# Altium PCB Inc_filter_v2.PcbDoc (part 4 of 4)
Units mm, origin at the board's own origin, x right, y up, seen from the top; angles counter-clockwise.
Board outline 339.6 x 339.6 mm, 2 copper layers (Top Layer, Bottom Layer); 640 components, 290 nets, 1708 pads, 357 vias.
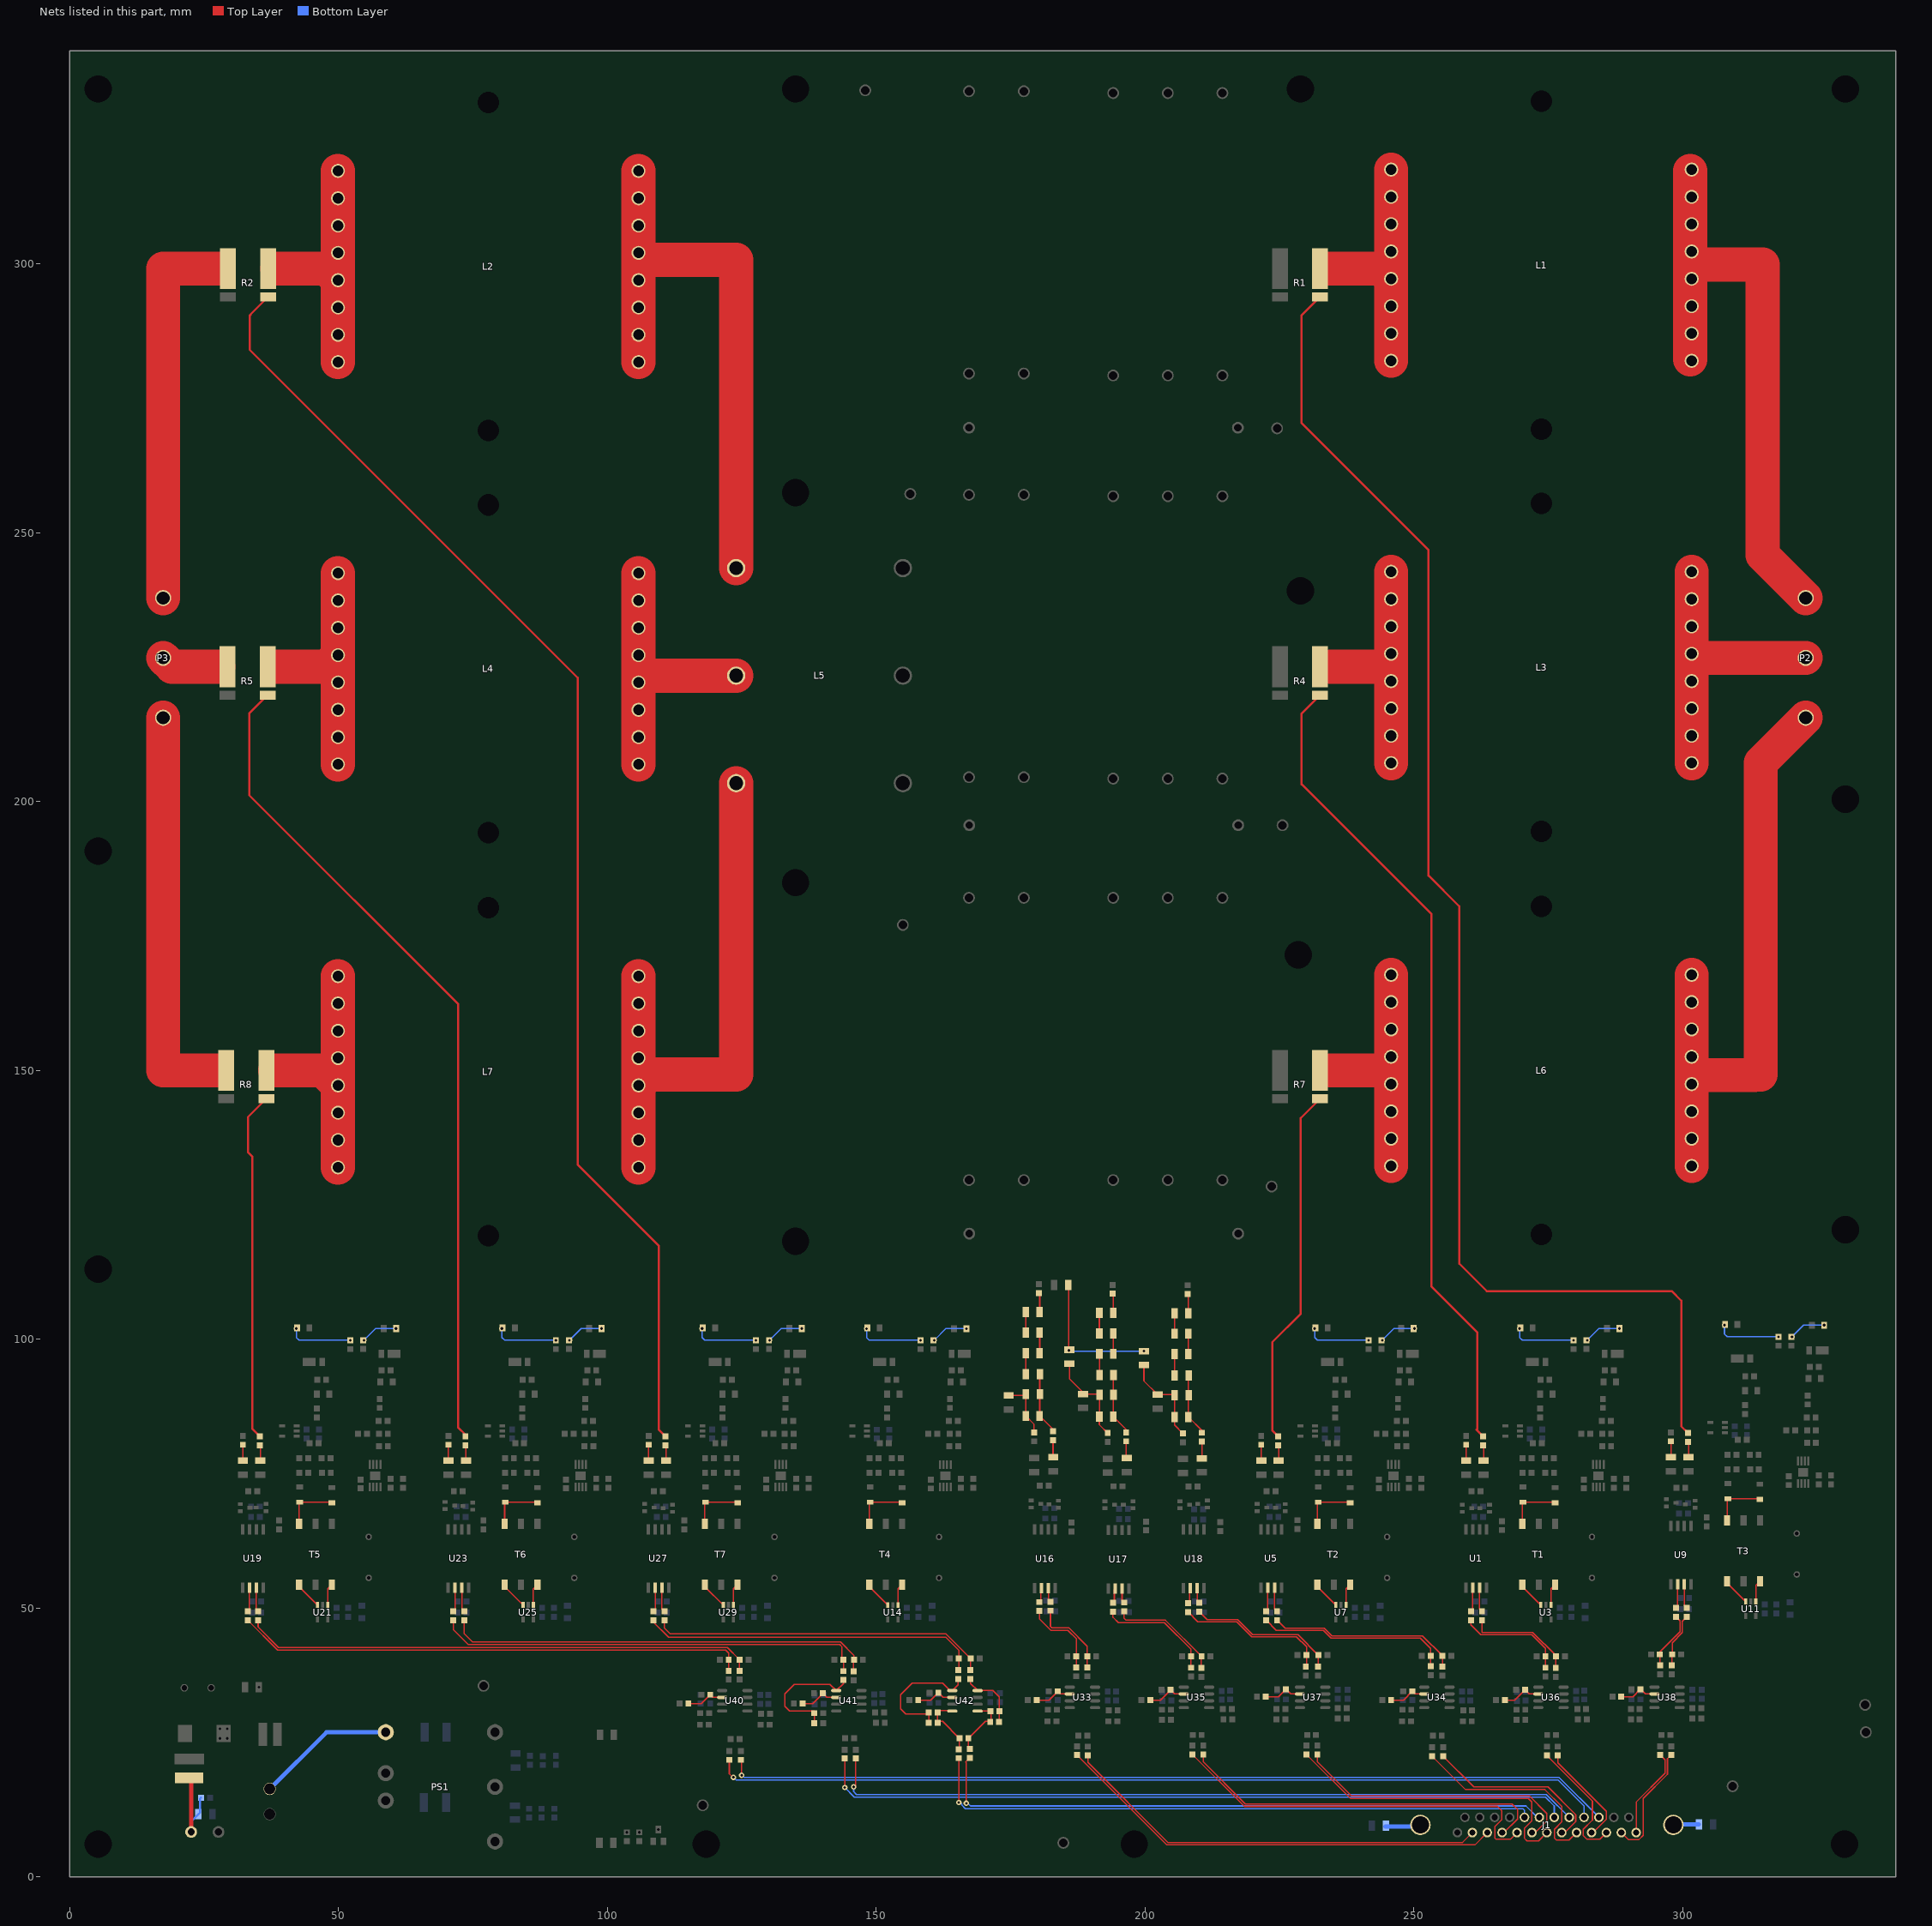
[diagram p4: the nets of this part, all layers, seen from the top]

## Via types
v1: diameter 1.016, hole 0.508, Top Layer to Bottom Layer, 354 vias
v2: diameter 1.27, hole 0.762, Top Layer to Bottom Layer, 3 vias

## Nets (pads, with @x,y where several pads share a name; then routed paths per layer and width w, separated by ;. In a path a pad name is that pad's centre, name@x,y a point inside that pad or via, vN(x,y) a via of type N, cw(c..) or ccw(c..) an arc to the next point about the centre after c; other vN are vias at no path point) (continued)
NetC267_2: C267.2 R165.1 R167.2 U41.1 | length 23.6
  Top Layer w0.2: C267.2@138.432,28.829 138.495,28.892 R167.2@138.495,30.48 138.495,30.861 133.859,30.861 132.97,31.75 132.97,34.036 134.748,35.814 141.415,35.814 U41.1@142.558,34.671 143.892,36.005 R165.1@143.892,36.64
NetC268_1: C268.1 R168.1 R172.1 R193.2 U42.5 | length 12.1
  Top Layer w0.2: R193.2@167.386,23.812 167.132,24.066 R172.1@167.132,25.781 170.307,28.956 171.261,28.956 171.324,29.019 171.324,30.988 171.197,30.861 U42.5@168.848,30.861
NetC268_2: C268.2 R168.2 R170.1 U42.8 | length 11.9
  Top Layer w0.2: R170.1@167.514,36.83 167.514,36.005 U42.8@168.848,34.671 171.705,34.671 172.847,33.529 C268.2@172.847,28.829
NetC274_1: C274.1 R172.2 R175.1 R194.2 U42.4 | length 12.4
  Top Layer w0.2: U42.4@164.148,30.861 164.021,30.988 161.354,30.988 161.354,28.956 162.307,28.956 R172.2@165.482,25.781 165.482,23.877 R194.2@165.354,23.749
NetC274_2: C274.2 R173.1 R175.2 U42.1 | length 23.6
  Top Layer w0.2: C274.2@159.768,28.702 159.768,30.353 155.449,30.353 154.56,31.242 154.56,33.909 156.719,36.068 162.307,36.068 163.704,34.671 U42.1@164.148,34.671 165.228,35.751 R173.1@165.228,36.83
NetC275_1: C275.1 C276.1 L8.1 P1.1 | length 17.3
  Top Layer w0.762: L8.1@22.225,18.415 22.606,18.034 P1.1@22.606,8.382
  Bottom Layer w0.4: P1.1@22.606,8.382 22.606,10.317 C275.1@23.973,11.684 24.257,11.968 24.257,14.541 C276.1@24.448,14.732
NetD3_1: D3.1 D6.2 T1.6 | length 10.1
  Top Layer w0.254: T1.6@270.134,65.666 270.134,69.594 D3.1@270.263,69.723 276.105,69.723 D6.2@276.232,69.596
NetD4_K: D4.K R15.2 | length 12.1
  Top Layer w0.254: D4.K@269.628,101.988 D4.K@269.748,102.108
  Bottom Layer w0.254: v1@269.628,101.988 v1(269.628,101.981) 269.628,100.328 270.135,99.821 v1(279.661,99.821)
NetD7_A: D7.A R17.2 | length 7.3
  Top Layer w0.254: R17.2@282.074,99.822 v1(282.201,99.822) ; D7.A@287.916,101.727 v1(288.17,101.981)
  Bottom Layer w0.254: v1(282.201,99.822) 284.36,101.981 v1(288.17,101.981)
NetD11_1: D11.1 D14.2 T2.6 | length 10.1
  Top Layer w0.254: T2.6@232.034,65.666 232.034,69.594 D11.1@232.163,69.723 238.005,69.723 D14.2@238.132,69.596
NetD12_K: D12.K R24.2 | length 12.1
  Top Layer w0.254: D12.K@231.528,101.988 D12.K@231.648,102.108
  Bottom Layer w0.254: v1@231.528,101.988 v1(231.528,101.981) 231.528,100.328 232.035,99.821 v1(241.561,99.821)
NetD15_A: D15.A R26.2 | length 7.3
  Top Layer w0.254: R26.2@243.974,99.822 v1(244.101,99.822) ; D15.A@249.816,101.727 v1(250.07,101.981)
  Bottom Layer w0.254: v1(244.101,99.822) 246.26,101.981 v1(250.07,101.981)
NetD19_1: D19.1 D22.2 T3.6 | length 10.1
  Top Layer w0.254: T3.6@308.227,66.301 308.227,70.229 D19.1@308.356,70.358 314.198,70.358 D22.2@314.325,70.231
NetD20_K: D20.K R33.2 | length 12.1
  Top Layer w0.254: D20.K@307.721,102.623 D20.K@307.841,102.743
  Bottom Layer w0.254: v1@307.721,102.623 v1(307.721,102.616) 307.721,100.963 308.228,100.456 v1(317.754,100.456)
NetD23_A: D23.A R35.2 | length 7.3
  Top Layer w0.254: R35.2@320.167,100.457 v1(320.294,100.457) ; D23.A@326.009,102.362 v1(326.263,102.616)
  Bottom Layer w0.254: v1(320.294,100.457) 322.453,102.616 v1(326.263,102.616)
NetD25_1: D25.1 D28.2 T4.6 | length 10.1
  Top Layer w0.254: T4.6@148.715,65.659 148.715,69.587 D25.1@148.844,69.716 154.686,69.716 D28.2@154.813,69.589
NetD26_K: D26.K R37.2 | length 12.1
  Top Layer w0.254: D26.K@148.209,101.981 D26.K@148.329,102.101
  Bottom Layer w0.254: v1@148.209,101.981 v1(148.209,101.974) 148.209,100.321 148.716,99.814 v1(158.242,99.814)
NetD29_A: D29.A R39.2 | length 7.3
  Top Layer w0.254: R39.2@160.655,99.815 v1(160.782,99.815) ; D29.A@166.497,101.72 v1(166.751,101.974)
  Bottom Layer w0.254: v1(160.782,99.815) 162.941,101.974 v1(166.751,101.974)
NetD39_1: D39.1 D42.2 T5.6 | length 10.1
  Top Layer w0.254: T5.6@42.67,65.666 42.67,69.594 D39.1@42.799,69.723 48.641,69.723 D42.2@48.768,69.596
NetD40_K: D40.K R82.2 | length 12.1
  Top Layer w0.254: D40.K@42.164,101.988 D40.K@42.284,102.108
  Bottom Layer w0.254: v1@42.164,101.988 v1(42.164,101.981) 42.164,100.328 42.671,99.821 v1(52.197,99.821)
NetD43_A: D43.A R84.2 | length 7.3
  Top Layer w0.254: R84.2@54.61,99.822 v1(54.737,99.822) ; D43.A@60.452,101.727 v1(60.706,101.981)
  Bottom Layer w0.254: v1(54.737,99.822) 56.896,101.981 v1(60.706,101.981)
NetD47_1: D47.1 D50.2 T6.6 | length 10.1
  Top Layer w0.254: T6.6@80.897,65.666 80.897,69.594 D47.1@81.026,69.723 86.868,69.723 D50.2@86.995,69.596
NetD48_K: D48.K R91.2 | length 12.1
  Top Layer w0.254: D48.K@80.391,101.988 D48.K@80.511,102.108
  Bottom Layer w0.254: v1@80.391,101.988 v1(80.391,101.981) 80.391,100.328 80.898,99.821 v1(90.424,99.821)
NetD51_A: D51.A R93.2 | length 7.3
  Top Layer w0.254: R93.2@92.837,99.822 v1(92.964,99.822) ; D51.A@98.679,101.727 v1(98.933,101.981)
  Bottom Layer w0.254: v1(92.964,99.822) 95.123,101.981 v1(98.933,101.981)
NetD55_1: D55.1 D58.2 T7.6 | length 10.1
  Top Layer w0.254: T7.6@118.115,65.666 118.115,69.594 D55.1@118.244,69.723 124.086,69.723 D58.2@124.213,69.596
NetD56_K: D56.K R100.2 | length 12.1
  Top Layer w0.254: D56.K@117.609,101.988 D56.K@117.729,102.108
  Bottom Layer w0.254: v1@117.609,101.988 v1(117.609,101.981) 117.609,100.328 118.116,99.821 v1(127.642,99.821)
NetD59_A: D59.A R102.2 | length 7.3
  Top Layer w0.254: R102.2@130.055,99.822 v1(130.182,99.822) ; D59.A@135.897,101.727 v1(136.151,101.981)
  Bottom Layer w0.254: v1(130.182,99.822) 132.341,101.981 v1(136.151,101.981)
NetFB1_1: FB1.1 R4.3 | length 153.4
  Top Layer w0.4: R4.3@232.611,219.784 R4.3@232.537,219.784 229.108,216.355 229.108,203.2 253.206,179.102 253.206,109.851 261.747,101.31 261.747,83.244 261.64,83.137 FB1.1@262.839,81.938
NetFB1_2: FB1.2 R11.1 | length 2.9
  Top Layer w0.2: FB1.2@262.839,80.288 262.941,80.187 R11.1@262.941,77.402
NetFB2_2: FB2.2 R14.1 | length 3
  Top Layer w0.2: R14.1@259.69,77.402 FB2.2@259.69,80.39
NetFB5_1: FB5.1 R7.3 | length 67.3
  Top Layer w0.2: FB5.1@224.663,82.04 224.536,82.167 FB5.1@224.663,82.294
  Top Layer w0.4: FB5.1@224.739,81.938 223.647,83.031 223.647,99.436 228.949,104.739 228.949,141.139 R7.3@232.537,144.727
NetFB5_2: FB5.2 R20.1 | length 2.9
  Top Layer w0.2: FB5.2@224.739,80.288 224.841,80.187 R20.1@224.841,77.402
NetFB6_2: FB6.2 R23.1 | length 3
  Top Layer w0.2: R23.1@221.59,77.402 FB6.2@221.59,80.39
NetFB9_1: FB9.1 R1.3 | length 262.6
  Top Layer w0.4: R1.3@232.537,293.825 229.108,290.396 229.108,270.347 252.698,246.757 252.698,186.214 258.413,180.499 258.413,114.042 263.521,108.934 297.938,108.934 299.72,107.152 299.72,83.786 FB9.1@300.932,82.573
NetFB9_2: FB9.2 R29.1 | length 2.9
  Top Layer w0.2: FB9.2@300.932,80.923 301.034,80.822 R29.1@301.034,78.037
NetFB10_2: FB10.2 R32.1 | length 3
  Top Layer w0.2: R32.1@297.783,78.037 FB10.2@297.783,81.025
NetFB15_2: FB15.2 R42.1 | length 3.6
  Top Layer w0.254: FB15.2@180.243,108.586 180.4,108.429 R42.1@180.4,105.029
NetFB16_2: FB16.2 R54.1 | length 3.6
  Top Layer w0.254: FB16.2@193.928,108.458 194.085,108.301 R54.1@194.085,104.901
NetFB17_2: FB17.2 R66.1 | length 3.6
  Top Layer w0.254: FB17.2@207.899,108.395 208.056,108.238 R66.1@208.056,104.838
NetFB18_1: FB18.1 R8.3 | length 65.2
  Top Layer w0.2: FB18.1@35.375,81.938 FB18.1@35.433,81.996
  Top Layer w0.4: FB18.1@35.375,81.938 34.004,83.309 34.004,133.926 33.147,134.783 33.147,141.298 R8.3@36.576,144.727
NetFB18_2: FB18.2 R78.1 | length 2.9
  Top Layer w0.2: FB18.2@35.375,80.288 35.477,80.187 R78.1@35.477,77.402
NetFB19_2: FB19.2 R81.1 | length 3
  Top Layer w0.2: R81.1@32.226,77.402 FB19.2@32.226,80.39
NetFB22_1: FB22.1 R5.3 | length 156
  Top Layer w0.2: FB22.1@73.602,81.938 FB22.1@73.66,81.996
  Top Layer w0.4: R5.3@36.83,219.784 33.401,216.355 33.401,201.168 72.263,162.306 72.263,83.566 73.602,82.227 FB22.1@73.602,81.938
NetFB22_2: FB22.2 R87.1 | length 2.9
  Top Layer w0.2: FB22.2@73.602,80.288 73.704,80.187 R87.1@73.704,77.402
NetFB23_2: FB23.2 R90.1 | length 3
  Top Layer w0.2: R90.1@70.453,77.402 FB23.2@70.453,80.39
NetFB26_1: FB26.1 R2.3 | length 245.3
  Top Layer w0.4: R2.3@36.934,293.825 33.655,290.546 33.655,290.487 33.496,290.328 33.496,284.004 94.488,223.012 94.488,132.461 109.601,117.348 109.601,83.158 FB26.1@110.82,81.938
NetFB26_2: FB26.2 R96.1 | length 2.9
  Top Layer w0.2: FB26.2@110.82,80.288 110.922,80.187 R96.1@110.922,77.402
NetFB27_2: FB27.2 R99.1 | length 3
  Top Layer w0.2: R99.1@107.671,77.402 FB27.2@107.671,80.39
NetJ1_2: J1.2 R190.1 | length 79.7
  Top Layer w0.254: R190.1@189.357,22.607 189.357,21.285 204.215,6.426 259.015,6.426 J1.2@260.844,8.255
NetJ1_3: J1.3 R192.1 | length 84.2
  Top Layer w0.254: R192.1@187.325,22.67 204.026,5.969 261.328,5.969 J1.3@263.614,8.255
NetJ1_4: J1.4 R186.1 | length 69.2
  Top Layer w0.254: R186.1@210.82,22.797 210.82,21.412 218.643,13.589 268.224,13.589 269.24,12.573 269.24,10.795 266.7,8.255 J1.4@266.384,8.255
NetJ1_5: J1.5 R188.1 | length 72.2
  Top Layer w0.254: R188.1@208.788,22.797 218.453,13.132 265.506,13.132 266.319,12.319 266.319,10.668 265.049,9.398 265.049,7.239 265.252,7.036 267.935,7.036 J1.5@269.154,8.255
NetJ1_6: J1.6 R182.1 | length 53.1
  Top Layer w0.254: R182.1@232.029,22.797 232.029,21.412 238.328,15.113 271.399,15.113 274.701,11.811 274.701,10.414 272.542,8.255 J1.6@271.924,8.255
NetJ1_7: J1.7 R184.1 | length 57.9
  Top Layer w0.254: R184.1@229.997,22.797 238.189,14.605 271.26,14.605 271.907,13.958 271.907,10.414 270.51,9.017 270.51,7.239 271.018,6.731 273.17,6.731 J1.7@274.694,8.255
NetJ1_8: J1.8 R189.1 | length 33.9
  Top Layer w0.254: R189.1@255.397,22.479 261.112,16.764 274.904,16.764 280.068,11.6 280.068,10.295 278.028,8.255 J1.8@277.464,8.255
NetJ1_9: J1.9 R191.1 | length 39.3
  Top Layer w0.254: R191.1@253.365,22.479 259.588,16.256 274.32,16.256 277.495,13.081 277.495,10.287 276.098,8.89 276.098,7.239 276.479,6.858 278.837,6.858 J1.9@280.234,8.255
NetJ1_10: J1.10 R185.1 | length 19.4
  Top Layer w0.2: 276.733,21.221 R185.1@276.733,22.606
  Top Layer w0.254: 276.733,21.221 285.75,12.204 285.75,10.732 283.273,8.255 J1.10@283.004,8.255
NetJ1_11: J1.11 R187.1 | length 24.2
  Top Layer w0.254: R187.1@274.701,22.606 283.17,14.137 283.17,10.59 281.453,8.873 281.453,7.726 282.143,7.036 284.555,7.036 J1.11@285.774,8.255
NetJ1_12: J1.12 R181.1 | length 22
  Top Layer w0.254: J1.12@288.544,8.255 289.814,6.985 291.846,6.985 292.608,7.747 292.608,14.593 297.129,19.115 297.129,21.984 R181.1@297.815,22.67
NetJ1_13: J1.13 R183.1 | length 17
  Top Layer w0.254: J1.13@291.314,8.255 291.314,13.946 296.672,19.304 296.672,21.781 R183.1@295.783,22.67
NetJ1_16: J1.16 R197.1 | length 165.6
  Top Layer w0.254: R197.1@124.841,21.781 124.765,21.705 124.968,21.502 v1(124.968,18.923)
  Bottom Layer w0.254: v1(124.968,18.923) 125.4,18.491 276.993,18.491 J1.16@284.389,11.095
NetJ1_17: J1.17 R198.1 | length 166.1
  Top Layer w0.254: R198.1@122.682,21.781 122.682,19.177 123.317,18.542 v1(123.444,18.542)
  Bottom Layer w0.254: v1(123.444,18.542) 123.952,18.034 276.803,18.034 281.619,13.218 J1.17@281.619,11.095
NetJ1_18: J1.18 R195.1 | length 141.8
  Top Layer w0.254: v1(145.796,16.764) 146.05,16.764 146.177,16.637 R195.1@146.177,22.035
  Bottom Layer w0.254: v1(145.796,16.764) 145.796,15.875 146.333,15.338 274.606,15.338 J1.18@278.849,11.095
NetJ1_19: J1.19 R196.1 | length 140.9
  Top Layer w0.254: v1(144.145,16.637) R196.1@144.145,22.035
  Bottom Layer w0.2: J1.19@276.079,11.095 J1.19@276.079,11.322
  Bottom Layer w0.254: v1(144.145,16.637) 145.923,14.859 274.438,14.859 276.079,13.218 J1.19@276.079,11.322
NetJ1_20: J1.20 R193.1 | length 116.5
  Top Layer w0.254: v1(166.751,13.716) 166.751,21.273 166.624,21.4 R193.1@167.386,22.162
  Bottom Layer w0.254: v1(166.751,13.716) 167.005,13.716 167.513,13.208 270.817,13.208 272.93,11.095 J1.20@273.309,11.095
NetJ1_21: J1.21 R194.1 | length 115.5
  Top Layer w0.254: v1(165.354,13.843) R194.1@165.354,22.099
  Bottom Layer w0.254: v1(165.354,13.843) 165.608,13.843 165.913,13.538 165.913,13.369 166.582,12.7 270.256,12.7 270.539,12.417 J1.21@270.539,11.095
NetJ1_26: J1.26 R199.1 | length 6.7
  Bottom Layer w0.762: R199.1@244.632,9.398 250.897,9.398 J1.26@251.174,9.675
NetJ1_27: J1.27 R200.2 | length 4.8
  Bottom Layer w0.762: J1.27@298.214,9.675 298.318,9.779 R200.2@302.992,9.779
NetL1_1: L1.1 L1.2 L1.3 L1.4 L1.5 L1.6 L1.7 L1.8 P2.3 | length 114
  Top Layer w6.35: L1.1@301.371,282.194 301.371,299.593 ; L1.8@301.371,317.246 301.371,299.593 ; P2.3@322.834,237.82 314.833,245.821 314.833,299.847 301.625,299.847 301.371,299.593
NetL1_9: L1.9 L1.10 L1.11 L1.12 L1.13 L1.14 L1.15 L1.16 R1.4 | length 47.8
  Top Layer w6.35: 234.315,299.085 243.84,299.085 L1.13@245.745,297.18 ; L1.16@245.745,281.94 L1.15@245.745,287.02 L1.14@245.745,292.1 L1.13@245.745,297.18 ; L1.9@245.745,317.5 L1.10@245.745,312.42 L1.11@245.745,307.34 L1.12@245.745,302.26 L1.13@245.745,297.18
NetL2_1: L2.1 L2.2 L2.3 L2.4 L2.5 L2.6 L2.7 L2.8 L5.4 | length 111.6
  Top Layer w6.35: L2.1@105.791,281.686 L2.2@105.791,286.766 L2.3@105.791,291.846 L2.4@105.791,296.926 L2.5@105.791,302.006 ; L2.8@105.791,317.246 L2.7@105.791,312.166 L2.6@105.791,307.086 L2.5@105.791,302.006 ; L5.4@123.952,243.393 123.952,300.736 107.061,300.736 L2.5@105.791,302.006
NetL2_9: L2.9 L2.10 L2.11 L2.12 L2.13 L2.14 L2.15 L2.16 R2.4 | length 47.8
  Top Layer w6.35: 38.608,299.085 47.752,299.085 L2.13@49.911,296.926 ; L2.16@49.911,281.686 L2.15@49.911,286.766 L2.14@49.911,291.846 L2.13@49.911,296.926 ; L2.9@49.911,317.246 L2.10@49.911,312.166 L2.11@49.911,307.086 L2.12@49.911,302.006 L2.13@49.911,296.926
NetL3_1: L3.1 L3.2 L3.3 L3.4 L3.5 L3.6 L3.7 L3.8 P2.2 | length 57.1
  Top Layer w6.35: L3.1@301.625,207.137 L3.2@301.625,212.217 L3.3@301.625,217.297 L3.4@301.625,222.377 L3.5@301.625,227.457 ; L3.8@301.625,242.697 L3.7@301.625,237.617 L3.6@301.625,232.537 L3.5@301.625,227.457 ; P2.2@322.834,226.695 302.387,226.695 L3.5@301.625,227.457
NetL3_9: L3.9 L3.10 L3.11 L3.12 L3.13 L3.14 L3.15 L3.16 R4.4 | length 44.3
  Top Layer w6.35: 234.569,225.044 243.332,225.044 ; L3.16@245.745,207.137 L3.15@245.745,212.217 L3.14@245.745,217.297 L3.13@245.745,222.377 L3.12@245.745,227.457 L3.11@245.745,232.537 L3.10@245.745,237.617 L3.9@245.745,242.697
NetL4_1: L4.1 L4.2 L4.3 L4.4 L4.5 L4.6 L4.7 L4.8 L5.5 | length 54.2
  Top Layer w6.35: L4.1@105.791,206.883 L4.2@105.791,211.963 L4.3@105.791,217.043 L4.4@105.791,222.123 ; L4.8@105.791,242.443 L4.7@105.791,237.363 L4.6@105.791,232.283 L4.5@105.791,227.203 L4.4@105.791,222.123 ; L5.5@123.952,223.393 107.061,223.393 L4.4@105.791,222.123
NetL4_9: L4.9 L4.10 L4.11 L4.12 L4.13 L4.14 L4.15 L4.16 R5.4 | length 47.8
  Top Layer w6.35: 38.608,225.044 47.752,225.044 L4.12@49.911,227.203 ; L4.16@49.911,206.883 L4.15@49.911,211.963 L4.14@49.911,217.043 L4.13@49.911,222.123 L4.12@49.911,227.203 ; L4.9@49.911,242.443 L4.10@49.911,237.363 L4.11@49.911,232.283 L4.12@49.911,227.203
NetL5_6: L5.6 L7.1 L7.2 L7.3 L7.4 L7.5 L7.6 L7.7 L7.8 | length 108.7
  Top Layer w6.35: L7.1@105.791,131.953 L7.2@105.791,137.033 L7.3@105.791,142.113 L7.4@105.791,147.193 ; L7.8@105.791,167.513 L7.7@105.791,162.433 L7.6@105.791,157.353 L7.5@105.791,152.273 L7.4@105.791,147.193 ; L5.6@123.952,203.393 123.952,149.225 107.823,149.225 L7.4@105.791,147.193
NetL6_1: L6.1 L6.2 L6.3 L6.4 L6.5 L6.6 L6.7 L6.8 P2.1 | length 119.4
  Top Layer w6.35: L6.1@301.625,132.207 L6.2@301.625,137.287 L6.3@301.625,142.367 L6.4@301.625,147.447 ; L6.8@301.625,167.767 L6.7@301.625,162.687 L6.6@301.625,157.607 L6.5@301.625,152.527 L6.4@301.625,147.447 ; P2.1@322.834,215.57 314.452,207.188 314.452,149.225 313.944,149.733 313.309,149.098 303.276,149.098 L6.4@301.625,147.447
NetL6_9: L6.9 L6.10 L6.11 L6.12 L6.13 L6.14 L6.15 L6.16 R7.4 | length 46.9
  Top Layer w6.35: 234.442,149.987 245.745,149.987 ; L6.16@245.745,132.207 L6.15@245.745,137.287 L6.14@245.745,142.367 L6.13@245.745,147.447 245.745,149.987 ; L6.9@245.745,167.767 L6.10@245.745,162.687 L6.11@245.745,157.607 L6.12@245.745,152.527 245.745,149.987
NetL7_9: L7.9 L7.10 L7.11 L7.12 L7.13 L7.14 L7.15 L7.16 R8.4 | length 48.4
  Top Layer w6.35: 38.227,149.987 47.117,149.987 L7.13@49.911,147.193 ; L7.16@49.911,131.953 L7.15@49.911,137.033 L7.14@49.911,142.113 L7.13@49.911,147.193 ; L7.9@49.911,167.513 L7.10@49.911,162.433 L7.11@49.911,157.353 L7.12@49.911,152.273 L7.13@49.911,147.193
NetP3_1: P3.1 R2.1 | length 71.6
  Top Layer w6.35: P3.1@17.399,237.82 17.399,299.085 27.686,299.085
NetP3_2: P3.2 R5.1 | length 11
  Top Layer w6.35: P3.2@17.399,226.695 19.05,225.044 27.686,225.044
NetP3_3: P3.3 R8.1 | length 75.5
  Top Layer w6.35: P3.3@17.399,215.57 17.399,149.987 27.305,149.987
NetPS1_6: PS1.6 SW1.2 | length 26
  Bottom Layer w0.762: SW1.2@37.211,16.383 47.752,26.924 PS1.6@58.801,26.924
NetR12_1: R12.1 U1.7 | length 4.6
  Top Layer w0.2: U1.7@262.179,53.771 262.179,49.859 R12.1@262.636,49.402
NetR12_2: R12.2 R125.2 R127.1 | length 20.1
  Top Layer w0.2: R12.2@262.636,47.752 262.636,45.485 272.073,45.485 276.352,41.206 R125.2@276.352,38.861
NetR13_1: R13.1 U1.6 | length 4.5
  Top Layer w0.2: R13.1@260.604,49.402 260.909,49.707 U1.6@260.909,53.771
NetR13_2: R13.2 R131.2 R134.1 | length 20.1
  Top Layer w0.2: R13.2@260.604,47.752 260.604,46.863 262.385,45.082 271.906,45.082 274.447,42.54 R134.1@274.447,41.021 R131.2@274.447,38.925
NetR21_1: R21.1 U5.7 | length 4.6
  Top Layer w0.2: U5.7@224.079,53.771 224.079,49.859 R21.1@224.536,49.402
NetR21_2: R21.2 R109.2 R111.1 | length 35.5
  Top Layer w0.2: R21.2@224.536,47.752 226.041,46.247 233.338,46.247 234.735,44.85 251.568,44.85 R111.1@255.27,41.148 R109.2@255.27,39.115
NetR22_1: R22.1 U5.6 | length 4.5
  Top Layer w0.2: R22.1@222.504,49.402 222.809,49.707 U5.6@222.809,53.771
NetR22_2: R22.2 R115.2 R118.1 | length 36.1
  Top Layer w0.2: R22.2@222.504,47.752 224.412,45.844 233.171,45.844 234.568,44.447 251.148,44.447 253.111,42.484 R118.1@253.111,41.148 R115.2@253.111,39.179
NetR30_1: R30.1 U9.7 | length 4.6
  Top Layer w0.2: U9.7@300.272,54.406 300.272,50.494 R30.1@300.729,50.037
NetR30_2: R30.2 R141.2 R143.1 | length 10.2
  Top Layer w0.2: R141.2@297.942,39.37 297.942,41.338 R143.1@298.006,41.402 298.006,43.567 299.866,45.427 299.866,47.524 R30.2@300.729,48.387
NetR31_1: R31.1 U9.6 | length 4.5
  Top Layer w0.2: R31.1@298.697,50.037 299.002,50.342 U9.6@299.002,54.406
NetR31_2: R31.2 R147.2 R150.1 | length 10.8
  Top Layer w0.2: R147.2@295.783,39.37 295.719,39.434 R150.1@295.719,41.402 295.719,41.851 299.463,45.594 299.463,47.524 ; R31.2@298.697,48.387 299.466,47.618
NetR42_2: R42.2 R43.1 | length 3.8
  Top Layer w0.254: R43.1@177.8,101.219 R42.2@177.8,105.029
NetR43_2: R43.2 R49.1 | length 3.8
  Top Layer w0.254: R49.1@180.4,97.409 R43.2@180.4,101.219
NetR44_1: R44.1 R178.1 | length 3.2
  Top Layer w0.254: R178.1@182.88,81.217 182.88,78.068 R44.1@182.91,78.038
NetR45_1: R45.1 U16.7 | length 2.8
  Top Layer w0.254: U16.7@182.021,53.743 182.021,51.561 R45.1@182.402,51.18 R45.1@182.402,51.054
NetR45_2: R45.2 R108.2 R110.1 | length 15.2
  Top Layer w0.2: R108.2@189.23,38.988 R110.1@189.231,41.021
  Top Layer w0.254: R45.2@182.402,49.53 182.402,46.591 182.661,46.332 185.824,46.332 189.23,42.926 R110.1@189.231,41.021
NetR46_1: R46.1 R47.1 R51.2 R207.2 | length 10.9
  Top Layer w0.254: R207.2@174.625,89.535 177.673,89.535 177.8,89.662 R47.1@177.8,85.725 179.354,84.171 R51.2@179.354,82.677
NetR46_2: R46.2 R47.2 R50.2 R178.2 | length 11.3
  Top Layer w0.254: R50.2@180.43,93.472 180.4,93.442 R47.2@180.4,85.725 R178.2@182.91,83.215
NetR48_1: R48.1 U16.6 | length 2.7
  Top Layer w0.254: R48.1@180.37,51.181 180.594,51.405 180.594,53.586 U16.6@180.751,53.743
NetR48_2: R48.2 R114.2 R116.1 | length 15.2
  Top Layer w0.2: R114.2@187.198,38.988 R116.1@187.198,40.64
  Top Layer w0.254: R48.2@180.34,49.467 180.34,48.006 182.471,45.875 185.635,45.875 187.198,44.311 R116.1@187.198,41.021 R116.1@187.198,40.64
NetR49_2: R49.2 R50.1 | length 3.9
  Top Layer w0.254: R49.2@177.8,97.409 177.83,97.379 R50.1@177.83,93.472
NetR54_2: R54.2 R55.1 | length 3.8
  Top Layer w0.254: R55.1@191.485,101.091 R54.2@191.485,104.901
NetR55_2: R55.2 R61.1 | length 3.8
  Top Layer w0.254: R61.1@194.085,97.281 R55.2@194.085,101.091
NetR56_1: R56.1 R177.1 | length 3.2
  Top Layer w0.254: R177.1@196.469,81.026 196.469,78.036 R56.1@196.595,77.91
NetR57_1: R57.1 U17.7 | length 2.8
  Top Layer w0.254: U17.7@195.706,53.615 195.706,51.433 R57.1@196.087,51.052 R57.1@196.087,50.926
NetR57_2: R57.2 R124.2 R126.1 | length 20.8
  Top Layer w0.2: R124.2@210.439,38.861 210.439,40.957 R126.1@210.503,41.021
  Top Layer w0.254: R57.2@196.087,49.402 196.087,48.134 196.469,47.752 203.772,47.752 R126.1@210.503,41.021
NetR58_1: R58.1 R59.1 R63.2 R205.2 R206.2 | length 17.4
  Top Layer w0.254: R205.2@185.928,95.444 185.928,92.613 188.722,89.819 191.357,89.819 R58.1@191.515,89.661 191.515,85.627 R59.1@191.485,85.597 191.485,84.103 R63.2@193.039,82.549
NetR58_2: R58.2 R59.2 R62.2 R177.2 | length 11.3
  Top Layer w0.254: R62.2@194.115,93.344 194.085,93.314 R59.2@194.085,85.597 R177.2@196.595,83.087
NetR60_1: R60.1 U17.6 | length 2.7
  Top Layer w0.254: R60.1@194.055,51.053 194.279,51.277 194.279,53.458 U17.6@194.436,53.615
NetR60_2: R60.2 R130.2 R132.1 | length 21.4
  Top Layer w0.2: R132.1@208.438,40.926 208.534,40.83 R130.2@208.534,38.925
  Top Layer w0.254: R60.2@194.025,49.339 194.025,48.291 195.021,47.295 203.583,47.295 208.534,42.343 R132.1@208.534,41.021
NetR61_2: R61.2 R62.1 | length 3.9
  Top Layer w0.254: R61.2@191.485,97.281 191.515,97.251 R62.1@191.515,93.344
NetR66_2: R66.2 R67.1 | length 3.8
  Top Layer w0.254: R67.1@205.456,101.028 R66.2@205.456,104.838
NetR67_2: R67.2 R73.1 | length 3.8
  Top Layer w0.254: R73.1@208.056,97.218 R67.2@208.056,101.028
NetR68_1: R68.1 R176.1 | length 3.1
  Top Layer w0.2: R68.1@210.566,77.847 R176.1@210.566,80.963
NetR69_1: R69.1 U18.7 | length 2.8
  Top Layer w0.254: U18.7@209.677,53.552 209.677,51.37 R69.1@210.058,50.989 R69.1@210.058,50.863
NetR69_2: R69.2 R140.2 R142.1 | length 27.7
  Top Layer w0.2: R69.2@210.058,49.339 211.529,47.868 217.181,47.868 219.964,45.085 228.41,45.085 R142.1@232.22,41.275 232.156,41.211 R140.2@232.156,39.115
NetR70_1: R70.1 R71.1 R75.2 R202.2 R203.2 | length 17.5
  Top Layer w0.254: R202.2@199.771,95.19 199.771,92.232 R203.2@202.311,89.692 205.392,89.692 R70.1@205.486,89.598 205.486,85.564 R71.1@205.456,85.534 205.456,84.04 R75.2@207.01,82.486
NetR70_2: R70.2 R71.2 R74.2 R176.2 | length 11.3
  Top Layer w0.254: R74.2@208.086,93.281 208.056,93.251 R71.2@208.056,85.534 R176.2@210.566,83.024
NetR72_1: R72.1 U18.6 | length 2.7
  Top Layer w0.254: R72.1@208.026,50.99 208.25,51.214 208.25,53.395 U18.6@208.407,53.552
NetR72_2: R72.2 R146.2 R148.1 | length 28.4
  Top Layer w0.2: R72.2@207.996,49.276 209.807,47.465 217.014,47.465 219.797,44.682 228.114,44.682 229.997,42.799 R148.1@229.997,41.275 229.997,39.242 R146.2@229.87,39.115
NetR73_2: R73.2 R74.1 | length 3.9
  Top Layer w0.254: R73.2@205.456,97.218 205.486,97.188 R74.1@205.486,93.281
NetR79_1: R79.1 U19.7 | length 4.7
  Top Layer w0.2: U19.7@34.715,53.771 34.715,49.613 34.926,49.402 R79.1@35.052,49.402 R79.1@35.172,49.402
NetR79_2: R79.2 R154.2 R155.1 | length 95.4
  Top Layer w0.2: R154.2@124.588,38.353 R155.1@124.588,40.385
  Top Layer w0.254: R79.2@35.052,47.752 35.052,46.487 38.867,42.672 122.301,42.672 R155.1@124.588,40.385
NetR80_1: R80.1 U19.6 | length 4.5
  Top Layer w0.2: R80.1@33.14,49.402 33.445,49.707 U19.6@33.445,53.771
NetR80_2: R80.2 R157.2 R158.1 | length 95.6
  Top Layer w0.2: R80.2@33.14,47.752 R80.2@33.528,47.752 ; R157.2@122.556,38.353 R158.1@122.556,40.386
  Top Layer w0.254: R80.2@33.14,47.752 38.677,42.215 121.996,42.215 122.556,41.655 R158.1@122.556,40.386
NetR88_1: R88.1 U23.7 | length 4.6
  Top Layer w0.2: U23.7@72.942,53.771 72.942,49.859 R88.1@73.399,49.402
NetR88_2: R88.2 R162.2 R163.1 | length 79.7
  Top Layer w0.2: R162.2@145.797,38.226 145.797,40.322 R163.1@145.861,40.386
  Top Layer w0.254: R88.2@73.399,47.752 73.399,45.219 74.93,43.688 143.383,43.688 145.861,41.21 R163.1@145.861,40.386
NetR89_1: R89.1 U23.6 | length 4.5
  Top Layer w0.2: R89.1@71.367,49.402 71.672,49.707 U23.6@71.672,53.771
NetR89_2: R89.2 R165.2 R166.1 | length 79.9
  Top Layer w0.2: R166.1@143.796,40.291 143.892,40.195 R165.2@143.892,38.29
  Top Layer w0.254: R89.2@71.367,47.752 71.367,45.981 74.117,43.231 143.194,43.231 143.637,42.787 143.637,40.641 R166.1@143.892,40.386
NetR97_1: R97.1 U27.7 | length 4.6
  Top Layer w0.2: U27.7@110.16,53.771 110.16,49.859 R97.1@110.617,49.402
NetR97_2: R97.2 R170.2 R171.1 | length 62.9
  Top Layer w0.2: R170.2@167.514,38.48 R171.1@167.514,40.512
  Top Layer w0.254: R97.2@110.617,47.752 110.617,46.29 111.695,45.212 162.954,45.212 167.514,40.652 R171.1@167.514,40.512
NetR98_1: R98.1 U27.6 | length 4.5
  Top Layer w0.2: R98.1@108.585,49.402 108.89,49.707 U27.6@108.89,53.771
NetR98_2: R98.2 R173.2 R174.1 | length 63
  Top Layer w0.2: R98.2@108.585,47.371 R98.2@108.585,47.752 ; R173.2@165.228,38.48 165.355,38.607 R174.1@165.355,40.64
  Top Layer w0.254: R98.2@108.585,47.371 111.379,44.577 162.943,44.577 165.355,42.165 R174.1@165.355,40.64
NetR201_2: R201.2 R202.1 R205.1 | length 26.5
  Top Layer w0.254: R201.2@185.674,110.109 185.801,109.982 v1(185.801,97.917) ; R201.2@185.928,110.049 R201.2@185.988,110.109 ; R202.1@199.644,97.917 v1(199.771,97.79)
  Bottom Layer w0.254: v1(185.801,97.917) 185.928,97.79 v1(199.771,97.79)
NetT1_1: T1.1 U3.3 | length 5.2
  Top Layer w0.254: T1.1@270.134,54.356 270.134,54.015 U3.3@273.57,50.579
NetT1_3: T1.3 U3.1 | length 4.1
  Top Layer w0.254: U3.1@275.47,50.579 275.47,53.592 T1.3@276.234,54.356
NetT2_1: T2.1 U7.3 | length 5.2
  Top Layer w0.254: T2.1@232.034,54.356 232.034,54.015 U7.3@235.47,50.579
NetT2_3: T2.3 U7.1 | length 4.1
  Top Layer w0.254: U7.1@237.37,50.579 237.37,53.592 T2.3@238.134,54.356
NetT3_1: T3.1 U11.3 | length 5.2
  Top Layer w0.254: T3.1@308.227,54.991 308.227,54.65 U11.3@311.663,51.214
NetT3_3: T3.3 U11.1 | length 4.1
  Top Layer w0.254: U11.1@313.563,51.214 313.563,54.227 T3.3@314.327,54.991
NetT4_1: T4.1 U14.3 | length 5.2
  Top Layer w0.254: T4.1@148.715,54.349 148.715,54.008 U14.3@152.151,50.572
NetT4_3: T4.3 U14.1 | length 4.1
  Top Layer w0.254: U14.1@154.051,50.572 154.051,53.585 T4.3@154.815,54.349
NetT5_1: T5.1 U21.3 | length 5.2
  Top Layer w0.254: T5.1@42.67,54.356 42.67,54.015 U21.3@46.106,50.579
NetT5_3: T5.3 U21.1 | length 4.1
  Top Layer w0.254: U21.1@48.006,50.579 48.006,53.592 T5.3@48.77,54.356
NetT6_1: T6.1 U25.3 | length 5.2
  Top Layer w0.254: T6.1@80.897,54.356 80.897,54.015 U25.3@84.333,50.579
NetT6_3: T6.3 U25.1 | length 4.1
  Top Layer w0.254: U25.1@86.233,50.579 86.233,53.592 T6.3@86.997,54.356
NetT7_1: T7.1 U29.3 | length 5.2
  Top Layer w0.254: T7.1@118.115,54.356 118.115,54.015 U29.3@121.551,50.579
NetT7_3: T7.3 U29.1 | length 4.1
  Top Layer w0.254: U29.1@123.451,50.579 123.451,53.592 T7.3@124.215,54.356
Vocm_IL1: C213.2 R107.2 U34.2 | length 7.1
  Top Layer w0.2: R107.2@245.744,32.893 248.031,32.893 C213.2@249.682,34.544 250.19,34.036 U34.2@251.904,34.036
Vocm_IL2: C227.2 R123.2 U36.2 | length 7.3
  Top Layer w0.2: R123.2@266.89,32.893 268.732,32.893 C227.2@270.637,34.798 271.399,34.036 U36.2@273.113,34.036
Vocm_IL3: C241.2 R139.2 U38.2 | length 7.3
  Top Layer w0.2: R139.2@288.353,33.528 R139.2@288.543,33.528 290.703,33.528 C241.2@292.1,34.925 292.989,34.036 U38.2@294.703,34.036
Vocm_Io1: C255.2 R153.2 U40.2 | length 7.2
  Top Layer w0.2: R153.2@115.062,32.258 117.476,32.258 C255.2@119.127,33.909 119.635,33.401 U40.2@121.349,33.401
Vocm_Io2: C262.2 R161.2 U41.2 | length 7.3
  Top Layer w0.2: R161.2@136.335,32.258 138.177,32.258 C262.2@140.082,34.163 140.844,33.401 U41.2@142.558,33.401
Vocm_Io3: C269.2 R169.2 U42.2 | length 7.3
  Top Layer w0.2: R169.2@157.798,32.893 160.148,32.893 C269.2@161.545,34.29 162.434,33.401 U42.2@164.148,33.401
Vocm_Vo1: C212.2 R106.2 U33.2 | length 7.1
  Top Layer w0.2: R106.2@179.831,32.893 182.118,32.893 C212.2@183.769,34.544 184.277,34.036 U33.2@185.991,34.036
Vocm_Vo2: C226.2 R122.2 U35.2 | length 7.3
  Top Layer w0.2: R122.2@200.977,32.893 202.819,32.893 C226.2@204.724,34.798 205.486,34.036 U35.2@207.2,34.036
Vocm_Vo3: C240.2 R138.2 U37.2 | length 7.3
  Top Layer w0.2: R138.2@222.44,33.528 224.79,33.528 C240.2@226.187,34.925 227.076,34.036 U37.2@228.79,34.036
pads on no net: J1.14 J1.15 L1. L2. L3. L4. L6. L7. T1.5 T2.5 T3.5 T4.5 T5.5 T6.5 T7.5 U2.4 U2.5 U4. U4.7 U6.4 U6.5 U8. U8.7 U10.4 U10.5 U12. U12.7 U13.4 U13.5 U15. U15.7 U20.4 U20.5 U22. U22.7 U24.4 U24.5 U26. U26.7 U28.4 U28.5 U30. U30.7 U32. U33.7 U34.7 U35.7 U36.7 U37.7 U38.7 U40.7 U41.7 U42.7

## Polygon pours and split planes (outlines as drawn)
GND_LV on Bottom Layer "GND_LOWVOLT" (solid, pour order 2): 1.27,56.642 338.201,56.642 338.201,1.397 69.977,1.397 69.977,40.351 1.27,40.351
GND_PWR on Bottom Layer "GND_POWER" (solid, pour order 4): 66.421,37.719 66.421,1.651 1.143,1.651 1.143,37.719 2.286,37.719

## Other copper
Bottom Layer:
  pour cut-out: 242.506,12.446 242.506,6.731 254,6.731 254,12.446
  pour cut-out: 295.148,12.446 295.148,6.731 305.181,6.731 305.181,12.446

## Silkscreen, mask and mechanical layers (free items; w line width, h text height)
Top Overlay:
  text "A" at 142.113,331.597 h2.2
  text "N" at 226.441,265.43 h2.2
  text "B" at 151.384,256.032 h2.2
  text "A" at 314.071,236.347 h2.2
  text "A" at 23.241,235.077 h2.2
  text "B" at 313.69,225.298 h2.2
  text "B" at 23.241,223.774 h2.2
  text "C" at 314.071,214.249 h2.2
  text "C" at 23.241,212.979 h2.2
  text "N" at 227.711,192.786 h2.2
  text "C" at 150.368,175.641 h2.2
  text "N" at 224.155,123.444 h2.2
  text "IC2" at 44.323,108.458 h2.2
  text "IB2" at 82.55,108.458 h2.2
  text "IA2" at 118.999,108.458 h2.2
  text "IC1" at 240.665,108.458 h2.2
  text "IB1" at 278.892,108.458 h2.2
  text "IA1" at 315.341,108.458 h2.2
  text "VC" at 171.45,103.378 h2.2
  text "VB" at 184.912,103.251 h2.2
  text "VA" at 199.009,103.251 h2.2
  text "GND" at 78.994,34.036 h1.27
  text "GND" at 328.041,30.861 h1.27
  text "GND" at 327.787,25.654 h1.27
  text "GND" at 311.023,16.002 h1.27
  text "25" at 258.445,15.621 h1.27
  text "14" at 288.417,15.24 h1.27
  text "GND" at 116.713,9.906 h1.27
  text "GND" at 187.325,5.588 h1.27
  text "Po-Hsu Huang / Inverter Filter Board V2 / Massachusetts Institute of Technology / 12-30-2017" at 128.397,3.556 h1.27
  text "+30V" at 17.145,3.429 h2.2 r90
  text "13" at 290.83,2.54 h1.27
  text "1" at 257.81,2.413 h1.27
Mechanical 2:
  lines w0.254: 0,340.741 0,341.249 ; 1.524,340.487 0,340.995 ; 1.524,341.503 0,340.995 ; 161.013,340.995 0,340.995 ; 178.585,340.995 339.598,340.995 ; 338.074,340.487 339.598,340.995 ; 338.074,341.503 339.598,340.995 ; 339.598,340.741 339.598,341.249 ; 340.614,1.524 341.122,0 ; 340.614,338.074 341.122,339.598 ; 340.868,0 341.376,0 ; 340.868,339.598 341.376,339.598 ; 341.122,161.013 341.122,0 ; 341.122,178.585 341.122,339.598 ; 341.63,1.524 341.122,0 ; 341.63,338.074 341.122,339.598 ; 0,0 339.598,0 339.598,339.598 0,339.598 0,0
  text "339.598 (mm)" at 161.267,340.081 h1.52
  text "339.598 (mm)" at 342.036,161.267 h1.52 r90

## Text inside footprints (layer, text, board x,y; h text height)
J1: Top Overlay "^ Board Edge ^" at 277.494,13.175 h1; Top Overlay "Pins 1, 25" at 256.194,13.175 h1